# Altium PCB dell_sound_cap.PcbDoc
Units mm, origin at the board's own origin, x right, y up, seen from the top; angles counter-clockwise.
Board outline 13.5 x 55.5 mm, 2 copper layers (Top Layer, Bottom Layer); 16 components, 15 nets, 85 pads, 31 vias.
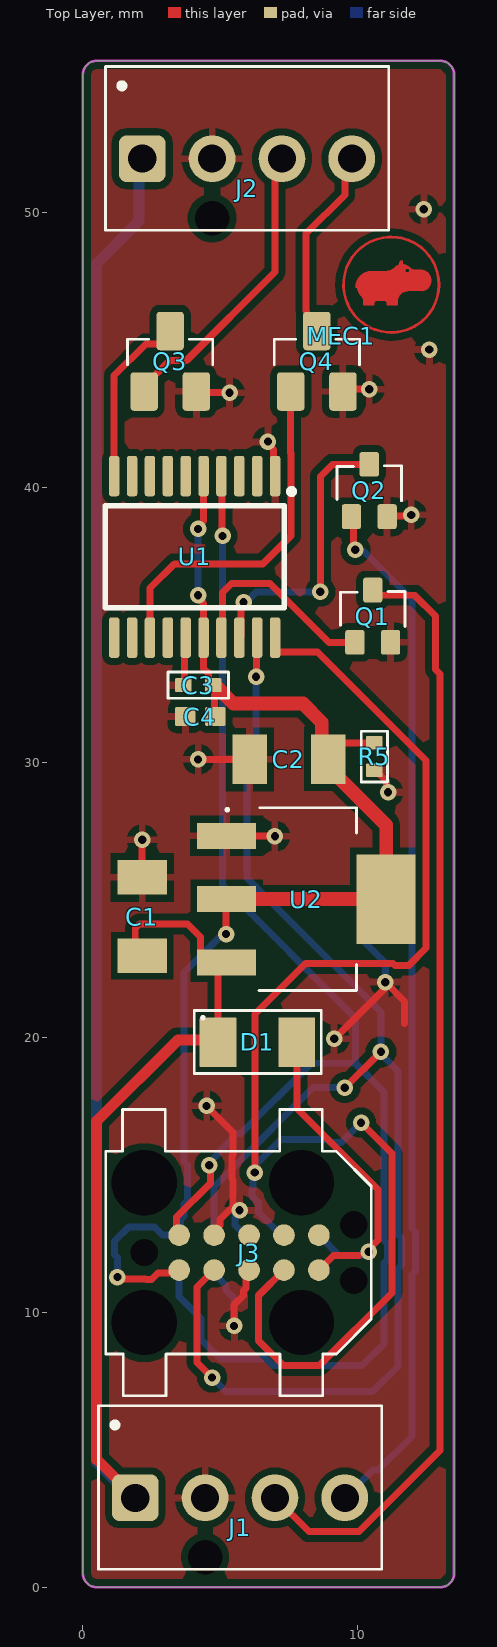
[diagram p0: Top Layer view]
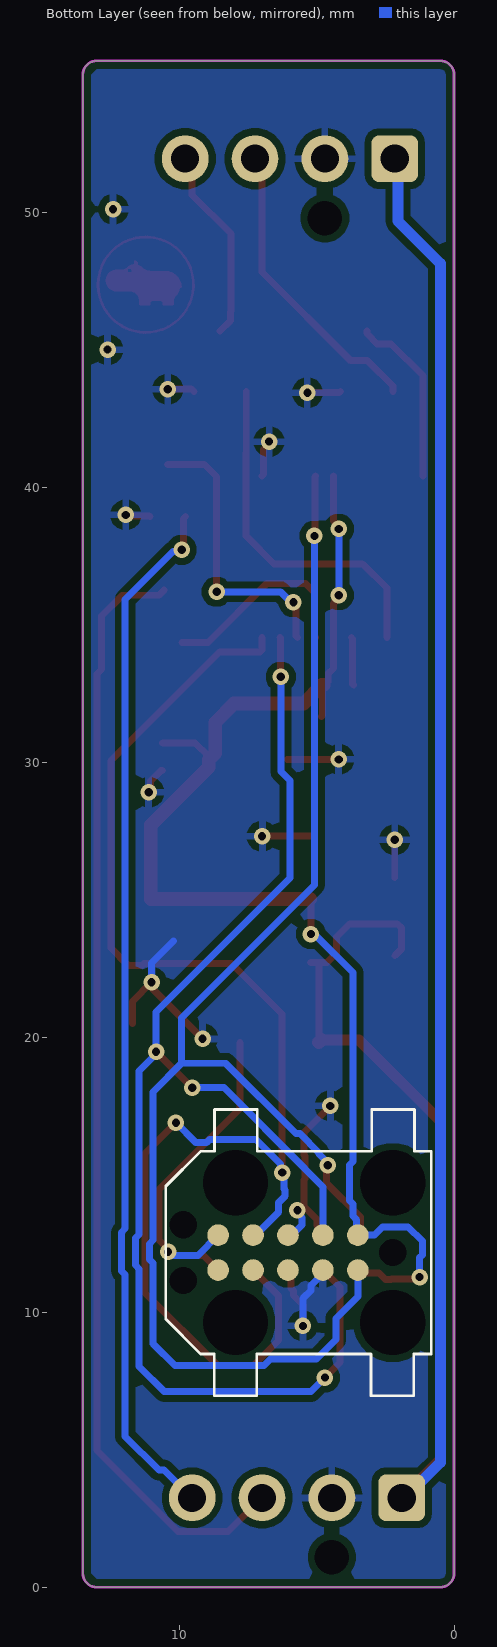
[diagram p1: Bottom Layer view, seen from below]
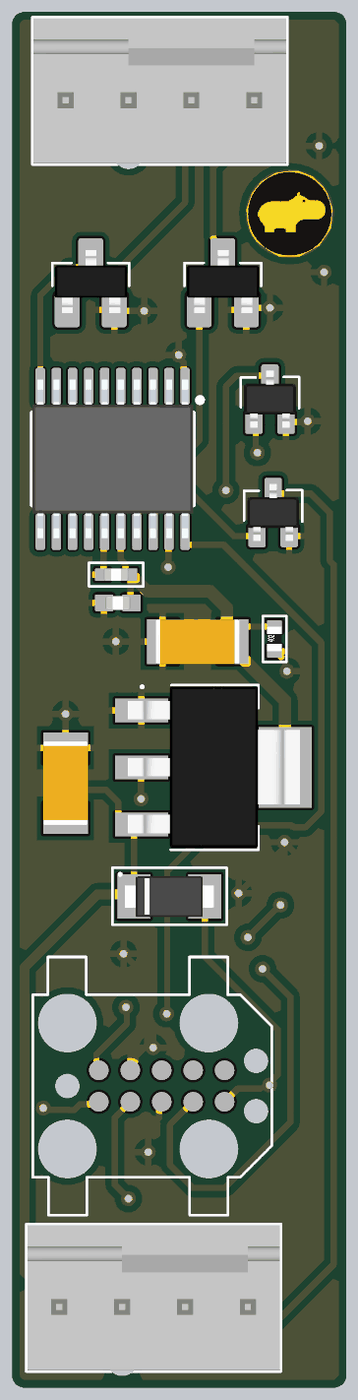
[diagram p2: 3D render of the assembled board from above, using the file's embedded part models]

## Layer stack, top to bottom
Top Solder: solder mask 0.0102, Solder Resist, Dk 3.5
Top Layer: signal copper 0.0356
Dielectric 1: dielectric 0.32, FR-4, Dk 4.8
Bottom Layer: signal copper 0.0356
Bottom Solder: solder mask 0.0102, Solder Resist, Dk 3.5

## Board outline
0,0.5 0,55 cw(c0.5,55) 0.5,55.5 13,55.5 cw(c13,55) 13.5,55 13.5,54.991 13.5,0.491 13.5,0.5 cw(c13,0.5) 13,0 0.5,0 cw(c0.5,0.5)

## Design rules (kind name [scope] priority, off if disabled: settings)
Clearance [All] p1: gap=0.254 ignorepadtopadclearanceinfootprint=FALSE
ComponentClearance [All] p1: gap=0.1 collisioncheckmode=3 verticalgap=0.254 showdistances=FALSE
MinimumSolderMaskSliver [All] p1: minsoldermaskwidth=0.1
PolygonConnect [All] p1: connectstyle=Relief reliefconductorwidth=0.254 reliefentries=4 polygonreliefangle="90 Angle" airgapwidth=0.254
RoutingVias [All] p1: holewidth=0.3 width=0.6 viastyle="Through Hole" minholewidth=0.3 minwidth=0.6 maxholewidth=0.3 maxwidth=0.6
SolderMaskExpansion [All] p1: expansion=0.102 istentingtop=FALSE
SupplyNets "Schematic Supply Nets_2" [InNet('+12V')] p1: voltage=0.000
SupplyNets "Schematic Supply Nets_1" [InNet('GND')] p2: voltage=0.000
SupplyNets "Schematic Supply Nets" [InNet('+3V3')] p3: voltage=0.000
Width [All] p1: maxlimit=5 minlimit=0.254 preferedwidth=0.254
28 further rules are at their usual default settings.

## Components (designator, comment, footprint, x,y, rotation, side; value= is the part's Value field where it differs from the comment)
C1 "10uF" CAP_1206_180_M 2.159,24.384 r180 top
C2 "10uF" CAP_1206_180_M 7.493,30.099 r270 top
C3 "10nF" CAP_0402_60_M 4.2,32.8 r270 top
C4 "4,7µF" CAP_0402_70_M 4.268,31.658 r270 top
D1 "SOD-123F" SOD-123FL 6.35,19.812 r0 top
J1 "CON_4PTS_2.54mm_KK_FAN" CON_4PTS_KK_FAN#1 5.715,3.248 r0 top
J2 "CON_4PTS_2.54mm_KK_FAN" CON_4PTS_KK_FAN#2 5.969,51.943 r0 top
J3 "JTAG" TC2050_DUAL 7.947,7.72 r0 top locked
MEC1 "LOGO_AESTECHNO" Logo_AESTECHNO 9.4,45.5 r0 top
Q1 "SOT-323" SOT-323 10.541,35.306 r0 top
Q2 "SOT-323" SOT-323 10.414,39.878 r0 top
Q3 "SOT23" SOT-23 3.175,44.577 r0 top
Q4 "SOT23" SOT-23 8.509,44.577 r0 top
R5 "1k" RES_0402_35_M 10.6,30.2 r90 top
U1 "STM32F030F4P6" TSSOP20-65P-650X440 4.064,37.465 r270 top
U2 "LM1117IMP-3.3/NOPB" SOT-223 8.128,25.019 r270 top

## Footprints (in the part's own frame and the unit in brackets; to place one, negate y for a bottom-side part, rotate by r counter-clockwise, add the part's x,y. Pads: shape width x height; smd on the part's side, far side on the other; paste and mask are expansions set on the pad)
CAP_0402_60_M [mm] "Capacitor chip 0402 60h M density"
  rrect15% 0.5x0.6 smd: 1(0,0.55) 2(0,-0.55)
  silkscreen extent -0.48,-1.1 0.48,1.1, body extent -0.26,-0.5 0.26,0.5, height 0.57
CAP_0402_70_M [mm] "Chip capacitor 0402 70 M"
  rrect15% 0.68x0.74 smd: 1(0,0.55) 2(0,-0.55)
  body extent -0.28,-0.5 0.29,0.5, height 0.51
CAP_1206_180_M [mm]
  rect 1.8x1.25 smd: 1(0,1.425) 2(0,-1.425)
  body extent -0.9,-1.7 0.9,1.7, height 1.8
CON_4PTS_KK_FAN#1 [mm] "47053-1000"
  rrect33% 1.7x1.7 hole 1.02: 1(-3.81,0)
  round 1.7 hole 1.02: 2(-1.27,0) 3(1.27,0) 4(3.81,0)
  round 0 hole 1.25 unplated: ""(-1.27,-2.16)
  silkscreen extent -5.15,-2.6 5.15,3.35, body extent -5.1,-2.54 5.1,3.3, height 10.04
CON_4PTS_KK_FAN#2 [mm] "47053-1000"
  rrect33% 1.7x1.7 hole 1.02: 1(-3.81,0)
  round 1.7 hole 1.02: 2(-1.27,0) 3(1.27,0) 4(3.81,0)
  round 0 hole 1.25 unplated: 3(-1.27,-2.16)
  silkscreen extent -5.15,-2.6 5.15,3.35, body extent -5.1,-2.54 5.1,3.3, height 10.04
Logo_AESTECHNO [mm]
  Top Layer pour cut-out: 0.922,0.297 1.235,0.168 1.519,0.092 1.706,0.074 1.92,0.07 2.214,0.099 2.696,0.287 2.839,0.378 2.915,0.418 3.088,0.574 3.421,1.012 3.597,1.575 3.597,2.065 3.494,2.562 3.219,3.006 2.87,3.318 2.409,3.563 2.064,3.639 1.695,3.656 1.366,3.608 1.116,3.517 0.787,3.333 0.677,3.256 0.472,3.06 0.214,2.7 0.105,2.395 0.016,2.032 0.036,1.575 0.126,1.263 0.189,1.097 0.249,0.994 0.433,0.705 0.69,0.462
  Top Layer region: 1067 vertices and 1 holes, not listed, extent 0.512,1.107 3.266,2.742
  Top Layer lines w0.1: 1.813,0.125 ccw(c1.813,1.86) 3.549,1.86 ccw(c1.813,1.86) 1.813,3.596 ; 2.614,3.4 ccw(c1.813,1.86) 0.273,2.661 ccw(c1.813,1.86) 1.012,0.321 ccw(c1.813,1.86) 3.353,1.059
RES_0402_35_M [mm] "Chip Resistor, 2-Leads, Body 1,00x0,50mm, IPC Medium Density"
  rrect15% 0.5x0.6 smd: 1(-0.5,0) 2(0.5,0)
  silkscreen extent -0.92,-0.48 0.92,0.48, body extent -0.5,-0.3 0.5,0.3, height 0.2
SOD-123FL [mm] "SODFL, 2-Leads, Body 1,73x3,60mm, IPC Medium Density"
  rrect5% 1.34x1.8 smd: 1(-1.43,0) 2(1.43,0)
  silkscreen extent -2.3,-1.14 2.32,1.16, body extent -1.79,-0.82 1.79,0.83, height 0.95
SOT-23 [mm]
  rrect25% 1x1.4 smd: 1(-0.95,-1.1) 2(0.95,-1.1) 3(0,1.1)
  silkscreen extent -1.55,-0.13 1.55,0.8, body extent -1.44,-1.23 1.48,1.32, height 0.99
SOT-223 [mm]
  rect 0.95x2.15 smd: 1(-2.3,-2.9) 2(0,-2.9) 3(2.3,-2.9)
  rect 3.25x2.15 smd: 4(0,2.9)
  silkscreen extent -3.32,-2.9 3.32,1.83, body extent -3.26,-3.46 3.24,3.5, height 1.66
SOT-323 [mm]
  rrect25% 0.7x0.9 smd: 1(-0.65,-0.95) 2(0.65,-0.95) 3(0,0.95)
  silkscreen extent -1.17,-0.38 1.17,0.9, body extent -1.05,-1.15 1.05,1.15, height 1
TC2050_DUAL [mil]
  round 31 smd: 1(-175,150) 2(-125,150) 3(-75,150) 4(-25,150) 5(25,150) 6(25,200) 7(-25,200) 8(-75,200) 9(-125,200) 10(-175,200)
  round 31 smd far side: 1(-175,200) 2(-125,200) 3(-75,200) 4(-25,200) 5(25,200) 6(25,150) 7(-25,150) 8(-75,150) 9(-125,150) 10(-175,150)
  round 0 hole 93.5 unplated: ""(-225,75) ""(-225,275) ""(0,75) ""(0,275)
  round 0 hole 39 unplated: ""(-225,175) ""(75,135.04) ""(75,214.96)
  silkscreen extent -280,-30 100,380
TSSOP20-65P-650X440 [mm]
  rrect50% 1.475x0.38 smd mask+0.07: 1(-2.938,2.925) 2(-2.938,2.275) 3(-2.938,1.625) 4(-2.938,0.975) 5(-2.938,0.325) 6(-2.938,-0.325) 7(-2.938,-0.975) 8(-2.938,-1.625) 9(-2.938,-2.275) 10(-2.938,-2.925) 11(2.938,-2.925) 12(2.938,-2.275) 13(2.938,-1.625) 14(2.938,-0.975) 15(2.938,-0.325) 16(2.938,0.325) 17(2.938,0.975) 18(2.938,1.625) 19(2.938,2.275) 20(2.938,2.925)
  silkscreen extent -2.47,-3.25 1.85,3.62, body extent -3.2,-3.25 3.2,3.25, height 1.2

## Part data
C1 C2: library part CAP_10uF_1206_50V_X5R, "CAP CER 10uF 50V 1206 X5R", Case Code (Imperial)=1206, Case Code (Metric)=3216, Dielectric=X5R, Manufacturer=Samsung, Manufacturer Part Number=CL31A106KBHNNNE, Max Operating Temperature=85°C, Min Operating Temperature=-55°C, Package Quantity=1, Supplier Part Number 1=1276-2876-1-ND, Tolerance=10%, Voltage Rating=50V, Capacitance=10uF, Case/Package=1206, ComponentLink1Description=Datasheet, ComponentLink1URL=https://media.digikey.com/pdf/Data%20Sheets/Samsung%20PDFs/CL_Series_MLCC_ds.pdf, ComponentLink2Description=http://www1.futureelectronics.com/doc/SAMSUNG%20PASSIVE/CL05B104KQ5NNNC.pdf, ComponentLink2URL=http://www1.futureelectronics.com/doc/SAMSUNG%20PASSIVE/CL05B104KQ5NNNC.pdf, ComponentLink3Description=http://www.rapidonline.com/pdf/71-0881.pdf, ComponentLink3URL=http://www.rapidonline.com/pdf/71-0881.pdf, ComponentLink4Description=https://www.verical.com/server-webapp/html/getDatasheet?partID=353196, ComponentLink4URL=https://www.verical.com/server-webapp/html/getDatasheet?partID=353196, ComponentLink5Description=https://produktinfo.conrad.com/datenblaetter/450000-474999/452492-da-01-en-VS_KONDENSATOR_1206.pdf, ComponentLink5URL=https://produktinfo.conrad.com/datenblaetter/450000-474999/452492-da-01-en-VS_KONDENSATOR_1206.pdf, Contact Plating=Tin, Depth=1.6mm, Height=1.6mm, Lead Free="Lead Free", Length=3.2mm, Material=Ceramic, Mount="Surface Mount", Packaging="Tape and Reel", Pricing 1="1 = 0,67000, 10 = 0,47700, 100 = 0,31420, 500 = 0,23276, 1000 = 0,19784 (USD)", Radiation Hardening=No, RoHS=Yes, Stock 1=1003545, Supplier 1=Digi-Key, Thickness=0.071inch, Voltage Rating (DC)=50V, Width=0.063inch
C3: library part CAP_10nF_0402_50V_X7R, "CAP CER 10nF 50V 0402 X7R", Case Code (Imperial)=0402, Case Code (Metric)=1005, Dielectric=X7R, Manufacturer=Samsung, Manufacturer Part Number=CL05B103KB5NNNC, Max Operating Temperature=125°C, Min Operating Temperature=-55°C, Package Quantity=1, Supplier Part Number 1=1276-1028-1-ND, Tolerance=10%, Voltage=50V, Capacitance=10nF, Case/Package=0402, ComponentLink1Description=Datasheet, ComponentLink1URL=https://www.verical.com/server-webapp/html/getDatasheet?partID=359682&src-supplier=Verical, ComponentLink2Description=https://www.distrelec.biz/Web/Downloads/_e/ng/MLCC_CatalogDownload2013_ENG.pdf?mime=application%2Fpdf&src-supplier=Distrelec, ComponentLink2URL=https://www.distrelec.biz/Web/Downloads/_e/ng/MLCC_CatalogDownload2013_ENG.pdf?mime=application%2Fpdf&src-supplier=Distrelec, ComponentLink3Description=https://produktinfo.conrad.com/datenblaetter/450000-474999/458761-da-01-en-VS_KONDENSATOR_0402.pdf?src-supplier=Conrad, ComponentLink3URL=https://produktinfo.conrad.com/datenblaetter/450000-474999/458761-da-01-en-VS_KONDENSATOR_0402.pdf?src-supplier=Conrad, Contact Plating=Tin, Depth=0.5mm, Height=0.5mm, Lead Free="Lead Free", Length=1mm, Material=Ceramic, Mount="Surface Mount", Packaging="Tape and Reel", Pricing 1="1 = 0,10000, 10 = 0,02300, 100 = 0,01020, 500 = 0,00726, 1000 = 0,00571, 2500 = 0,00519, 5000 = 0,00477 (USD)", Radiation Hardening=No, RoHS=Yes, Stock 1=10927176, Supplier 1=Digi-Key, Thickness=0.022inch, Voltage Rating=50V, Voltage Rating (DC)=50V, Width=0.02inch
C4: library part CAP_4.7uF_0402_10V_X5R, "CAP CER 4.7uF 10V X5R 0402", Case/Package=0402, Dielectric=X5R, Manufacturer=Murata, Manufacturer Part Number=GRM155R61A475MEAAD, Supplier Part Number 1=490-14306-1-ND, Tolerance=20%, Voltage=10V, Capacitance=4,7µF, ComponentLink1Description=https://datasheet.ciiva.com/144/docfinderpartnumber-c0402c470j5gactu-144106.pdf?src-supplier=Digi-Key, ComponentLink1URL=https://datasheet.ciiva.com/144/docfinderpartnumber-c0402c470j5gactu-144106.pdf?src-supplier=Digi-Key, ComponentLink2Description=https://datasheet.ciiva.com/18100/getdatasheetpartid-32341-18100871.pdf?src-supplier=Verical, ComponentLink2URL=https://datasheet.ciiva.com/18100/getdatasheetpartid-32341-18100871.pdf?src-supplier=Verical, ComponentLink3Description=https://datasheet.ciiva.com/7378/1372242-7378762.pdf?src-supplier=Newark, ComponentLink3URL=https://datasheet.ciiva.com/7378/1372242-7378762.pdf?src-supplier=Newark, ComponentLink4Description=https://datasheet.ciiva.com/7747/f9080b-0402-series-c0g-7747645.pdf?src-supplier=Element14, ComponentLink4URL=https://datasheet.ciiva.com/7747/f9080b-0402-series-c0g-7747645.pdf?src-supplier=Element14, ComponentLink5Description=https://datasheet.ciiva.com/14588/70095383-14588206.pdf?src-supplier=Allied+Electronics, ComponentLink5URL=https://datasheet.ciiva.com/14588/70095383-14588206.pdf?src-supplier=Allied+Electronics, ComponentLink6Description=https://datasheet.ciiva.com/7747/40889-7747541.pdf?src-supplier=Element14, ComponentLink6URL=https://datasheet.ciiva.com/7747/40889-7747541.pdf?src-supplier=Element14, ComponentLink7Description=https://datasheet.ciiva.com/6177/f9080b-0402-series-c0g-6177898.pdf?src-supplier=Farnell, ComponentLink7URL=https://datasheet.ciiva.com/6177/f9080b-0402-series-c0g-6177898.pdf?src-supplier=Farnell, ComponentLink8Description=https://datasheet.ciiva.com/7378/1372242-7378507.pdf?src-supplier=Newark, ComponentLink8URL=https://datasheet.ciiva.com/7378/1372242-7378507.pdf?src-supplier=Newark, ComponentLink9Description=https://datasheet.ciiva.com/14602/70095383-14602972.pdf?src-supplier=Allied+Electronics, ComponentLink9URL=https://datasheet.ciiva.com/14602/70095383-14602972.pdf?src-supplier=Allied+Electronics, ComponentLink10Description=https://datasheet.ciiva.com/5422/kem-c1003-c0g-smd-5422301.pdf?src-supplier=Mouser, ComponentLink10URL=https://datasheet.ciiva.com/5422/kem-c1003-c0g-smd-5422301.pdf?src-supplier=Mouser, ComponentLink11Description=http://www.farnell.com/datasheets/2189109.pdf?src-supplier=Farnell, ComponentLink11URL=http://www.farnell.com/datasheets/2189109.pdf?src-supplier=Farnell, ComponentLink12Description=http://search.murata.co.jp/Ceramy/image/img/A01X/G101/ENG/GRM155R61A475MEAA-01.pdf?src-supplier=Digi-Key, ComponentLink12URL=http://search.murata.co.jp/Ceramy/image/img/A01X/G101/ENG/GRM155R61A475MEAA-01.pdf?src-supplier=Digi-Key, ComponentLink13Description=https://search.murata.co.jp/Ceramy/image/img/A01X/G101/ENG/GRM155R61A475MEAA-01.pdf?src-supplier=Digi-Key, ComponentLink13URL=https://search.murata.co.jp/Ceramy/image/img/A01X/G101/ENG/GRM155R61A475MEAA-01.pdf?src-supplier=Digi-Key, ComponentLink14Description=http://datasheet.octopart.com/GRM155R61A475MEAAD-Murata-datasheet-68589269.pdf?src-supplier=Newark, ComponentLink14URL=http://datasheet.octopart.com/GRM155R61A475MEAAD-Murata-datasheet-68589269.pdf?src-supplier=Newark, ComponentLink15Description=http://datasheet.octopart.com/GRM155R61A475MEAAD-Murata-datasheet-8819587.pdf, ComponentLink15URL=http://datasheet.octopart.com/GRM155R61A475MEAAD-Murata-datasheet-8819587.pdf, ComponentLink16Description=http://datasheet.octopart.com/GRM155R61A475MEAAD-Murata-datasheet-10025737.pdf, ComponentLink16URL=http://datasheet.octopart.com/GRM155R61A475MEAAD-Murata-datasheet-10025737.pdf, ComponentLink17Description=http://datasheet.octopart.com/GRM155R61A475MEAAD-Murata-datasheet-11978611.pdf, ComponentLink17URL=http://datasheet.octopart.com/GRM155R61A475MEAAD-Murata-datasheet-11978611.pdf, ComponentLink18Description=http://datasheet.octopart.com/GRM155R61A475MEAAD-Murata-datasheet-12510076.pdf, ComponentLink18URL=http://datasheet.octopart.com/GRM155R61A475MEAAD-Murata-datasheet-12510076.pdf, ComponentLink19Description=http://datasheet.octopart.com/GRM155R61A475MEAAD-Murata-datasheet-12515295.pdf, ComponentLink19URL=http://datasheet.octopart.com/GRM155R61A475MEAAD-Murata-datasheet-12515295.pdf, Pricing 1="1 = 0,23000, 10 = 0,15400, 100 = 0,07780, 500 = 0,05322, 1000 = 0,04708, 2500 = 0,04504, 5000 = 0,04094 (USD)", Stock 1=680935, Supplier 1=Digi-Key
D1: library part DIO_SCHOTTKY_1A_20V_SOD_123F, "DIODE SCHOTTKY 20V 1A SOD-123F", Average Rectified Current=1A, Manufacturer="ON Semiconductor / Fairchild", Manufacturer Part Number=MBR1020VL, Max Forward Surge Current (Ifsm)=45A, Max Repetitive Reverse Voltage (Vrrm)=20V, Supplier Part Number 1=MBR1020VLCT-ND, Case/Package=SOD-123F, ComponentLink1Description=Datasheet, ComponentLink1URL=https://datasheet.octopart.com/MBR1020VL-ON-Semiconductor-datasheet-86697812.pdf, ComponentLink2Description=http://www.farnell.com/datasheets/2552643.pdf?src-supplier=Farnell, ComponentLink2URL=http://www.farnell.com/datasheets/2552643.pdf?src-supplier=Farnell, ComponentLink3Description=https://www.fairchildsemi.com/datasheets/MB/MBR1020VL.pdf?src-supplier=Digi-Key, ComponentLink3URL=https://www.fairchildsemi.com/datasheets/MB/MBR1020VL.pdf?src-supplier=Digi-Key, ComponentLink4Description=http://www.farnell.com/datasheets/2552643.pdf?src-supplier=Newark, ComponentLink4URL=http://www.farnell.com/datasheets/2552643.pdf?src-supplier=Newark, Element Configuration=Single, Max Reverse Voltage (DC)=20V, Mount="Surface Mount", Packaging="Tape and Reel", Pricing 1="1 = 0,380000, 10 = 0,279000, 100 = 0,158200, 500 = 0,104760, 1000 = 0,080320 (USD)", Reverse Recovery Time=12.4ns, RoHS=Yes, Stock 1=25209, Supplier 1=Digi-Key, Supplier 2=Digi-Key, Supplier Part Number 2=1514-CMMSH1-20GTRPBFREECT-ND, Weight=0.0276g
J1 J2: "CONN HEADER VERT 4POS 2.54MM", Color=Beige, Manufacturer=Molex, Manufacturer Part Number=0470531000, Max Operating Temperature=75°C, Min Operating Temperature=0°C, Supplier Part Number 1=WM4330-ND, ComponentLink1Description=Drawings, ComponentLink1URL=https://www.molex.com/pdm_docs/sd/470531000_sd.pdf, Connector Type="Male Pin", Contact Material="Brass,Copper Alloy", Contact Mating Length=0.295inch, Contact Plating=Tin, Depth=5.84mm, Fastening Type=Friction, Housing Color=Beige, Housing Material=Nylon, Length=10.2mm, Mount="Through Hole", Number of Contacts=4, Number of Positions=4, Number of Rows=1, Orientation=Straight, Packaging=Bulk, Pitch=2.54mm, RoHS=Yes, Stock 1=41699, Supplier 1=Digi-Key, Termination=Solder
J3: library part TC2050_DUAL, "JTAG CONNECTOR", ComponentLink1Description=Datasheet
MEC1: "LOGO AESTECNO"
Q1 Q2: library part TRS_NMOS_30V_0.38A_DMN63D8LW-13, "MOSFET N-CH 30V 0.38A SOT323", Continuous Drain Current (ID)=380mA, Drain to Source Voltage (Vdss)=30V, Input Capacitance=23.2pF, Manufacturer=Diodes, Manufacturer Part Number=DMN63D8LW-13, Max Operating Temperature=150°C, Max Power Dissipation=300mW, Min Operating Temperature=-55°C, Supplier Part Number 1=DMN63D8LW-13DICT-ND, Case/Package=SOT-323, ComponentLink1Description=Datasheet, ComponentLink1URL=https://www.diodes.com/assets/Datasheets/DMN63D8LW.pdf, Mount="Surface Mount", Packaging="Tape and Reel", Pricing 1="1=0,26000, 10=0,24100, 100=0,13480, 500=0,07222, 1000=0,04912 (USD)", Rds On Max=2.8R, RoHS=Yes, Stock 1=214518, Supplier 1=Digi-Key
Q3 Q4: library part TRS_NMOS_30V_5.8AA_DMN3404L-7_SOT23, "Small Signal Field-Effect Transistor", Drain Current-Max (Abs) (ID)=5.8A, Drain-source On Resistance-Max=28mR, DS Breakdown Voltage-Min=30V, Manufacturer=Diodes, Manufacturer Part Number=DMN3404L-7, Max Operating Temperature=150°C, Operating Mode="ENHANCEMENT MODE", Package Body Material=Plastic, Package Shape=Rectangular, Package Style="SMALL OUTLINEMeter", Peak Reflow Temperature (Cel)=260°C, Power Dissipation-Max (Abs)=1.4W, Pulsed Drain Current-Max (IDM)=30A, Supplier Part Number=DMN3404LDICT-ND, Time @ Peak Reflow Temperature-Max (s)=40s, Additional Feature="HIGH RELIABILITY", Case/Package=SOT23, Category=MOSFETs, ComponentLink1Description=Datasheet, ComponentLink1URL=https://www.diodes.com/assets/Datasheets/DMN63D8LW.pdf, Drain Current-Max (ID)=5.8A, FET Technology="METAL-OXIDE SEMICONDUCTOR", JESD-30 Code=R-PDSO-G3, JESD-609 Code=e3, Moisture Sensitivity Level=1, Number of Elements=1, Pins=3, Polarity/Channel Type=N-CHANNEL, Pricing="1=0.35, 10=0.211, 100=0.1326, 500=0.09838, 1000=0.08729 (USD)", Qualification Status="Not Qualified", Reach SVHC Compliant=Yes, RoHS=Yes, RoHS Compliant=Yes, Stock=79423, Supplier=Digikey, Surface Mount=Yes, Terminal Finish=Tin, Terminal Form="Gull Wing", Terminal Position=DUAL, Transistor Application=SWITCHING, Transistor Element Material=SILICON
R5: library part RES_1K_62.5mW_1%_0402, "RES 1k 62.5mW 1% 0402", Case Code (Imperial)=0402, Case Code (Metric)=1005, Manufacturer=Yageo, Manufacturer Part Number=RC0402FR-071KL, Max Operating Temperature=155°C, Min Operating Temperature=-55°C, Power Rating=63mW, Supplier Part Number 1=311-1.00KLRCT-ND, Temperature Coefficient=100ppm/°C, Tolerance=1%, Voltage Rating=50V, Case/Package=0402, ComponentLink1Description=http://documents.rs-components.com/techlib://itc_doclist_GB.htm?stockno=6186122&src-supplier=RSComponents, ComponentLink1URL=http://documents.rs-components.com/techlib://itc_doclist_GB.htm?stockno=6186122&src-supplier=RSComponents, ComponentLink2Description=http://www.mouser.com/ds/2/447/PYu-RC0402_51_RoHS_L_6_r-8721.pdf?src-supplier=Mouser, ComponentLink2URL=http://www.mouser.com/ds/2/447/PYu-RC0402_51_RoHS_L_6_r-8721.pdf?src-supplier=Mouser, ComponentLink3Description=http://www.yageo.com/documents/recent/PYu-RC0402_51_RoHS_L_6_r.pdf?src-supplier=Future+Electronics, ComponentLink3URL=http://www.yageo.com/documents/recent/PYu-RC0402_51_RoHS_L_6_r.pdf?src-supplier=Future+Electronics, ComponentLink4Description=http://www.farnell.com/datasheets/1018594.pdf?src-supplier=Element14, ComponentLink4URL=http://www.farnell.com/datasheets/1018594.pdf?src-supplier=Element14, ComponentLink5Description=http://www.farnell.com/datasheets/2167052.pdf?src-supplier=Element14, ComponentLink5URL=http://www.farnell.com/datasheets/2167052.pdf?src-supplier=Element14, Composition="Thick Film", Depth=0.5mm, Height=0.32mm, Lead Free="Lead Free", Length=1mm, Military Standard=Not, Number of Pins=2, Packaging="Tape and Reel", Pricing 1="1 = 0,10000, 10 = 0,01600, 100 = 0,00670, 1000 = 0,00301, 2500 = 0,00261, 5000 = 0,00215 (USD)", REACH SVHC=Unknown, Resistance=1k, RoHS=Yes, Stock 1=111913296, Supplier 1=Digi-Key, Termination=SMD/SMT, Voltage Rating (DC)=50V, Width=0.5mm
U1: "ARM® Cortex®-M0 STM32F0 Microcontroller IC 32-Bit Single-Core 48MHz 16KB (16K x 8) FLASH 20-TSSOP", Manufacturer_Name=ST, Manufacturer_Part_Number=STM32F030F4P6TR, PartNumber=1000044559, Rev=A
U2: library part CIN_REG_LDO_3V3_800mA_SOT-223, "REG LDO 3V3 800mA", Case/Package=SOT-223, Dropout Voltage=1.2V, Manufacturer="Texas Instruments", Manufacturer Part Number=LM1117IMPX-3.3/NOPB, Max Input Voltage=15V, Max Operating Temperature=125°C, Max Output Current=800mA, Min Input Voltage=2.6V, Min Operating Temperature=-40°C, Nominal Output Voltage=3.3V, Output Voltage Accuracy=1%, Quiescent Current=5mA, Supplier Part Number 1=LM1117IMPX-3.3/NOPBCT-ND, Accuracy=1%, ComponentLink1Description=Datasheet, ComponentLink1URL=http://www.ti.com/lit/ds/symlink/lm1117.pdf, ComponentLink2Description=http://www.farnell.com/datasheets/1882372.pdf?src-supplier=Element14, ComponentLink2URL=http://www.farnell.com/datasheets/1882372.pdf?src-supplier=Element14, Contact Plating=Matte,Tin, Lead Free="Lead Free", Mount="Surface Mount", Number of Outputs=1, Number of Pins=4, Output Current=800mA, Output Type=Fixed, Output Voltage=3.3V, Packaging="Tape and Reel", Polarity=Positive, Pricing 1="1 = 1,14000, 10 = 1,01500, 100 = 0,79120, 500 = 0,65364, 1000 = 0,51603 (USD)", REACH SVHC="No SVHC", RoHS=Yes, Stock 1=34433, Supplier 1=Digi-Key

## Via types
v1: diameter 0.6, hole 0.3, Top Layer to Bottom Layer, tented both sides, 31 vias

## Nets (pads, with @x,y where several pads share a name; then routed paths per layer and width w, separated by ;. In a path a pad name is that pad's centre, name@x,y a point inside that pad or via, vN(x,y) a via of type N, cw(c..) or ccw(c..) an arc to the next point about the centre after c; other vN are vias at no path point)
+3V3: C2.1 C3.1 C4.1 J3.1 R5.2 U1.5 U1.16 U2.2 U2.4 | length 48.4
  Top Layer w0.254: v1(1.258,11.275) 1.324,11.209 2.274,11.209 2.289,11.193 2.5,11.193 2.734,11.428 3.4,11.428 J3.1@3.502,11.53 ; v1(4.191,36.068) 4.191,35.974 4.389,35.776 4.389,33.408 4.577,33.22 4.577,32.923 4.7,32.8 C3.1 ; v1(4.191,38.481) 4.191,38.575 4.389,38.773 U1.5 ; C3.1@4.8,32.8 4.784,32.784 4.784,31.693 C4.1 ; v1(5.207,23.749) 5.207,24.998 U2.2 ; C2.1 8.918,30.202 9.416,30.7 R5.2
  Top Layer w0.5: C3.1 4.8,32.8 5.469,32.131 8.001,32.131 8.683,31.449 8.683,30.334 C2.1 8.918,29.824 11.028,27.714 U2.4 U2.2
  Bottom Layer w0.254: v1(1.258,11.275) 1.258,11.981 1.156,12.083 1.156,12.586 1.67,13.1 2.6,13.1 2.898,12.802 3.5,12.802 J3.1@3.502,12.8 ; J3.1@3.404,12.802 3.542,12.94 3.542,13.348 3.683,13.489 3.683,13.938 3.8,14.055 3.8,15.355 3.683,15.472 3.683,22.352 5.014,23.683 5.141,23.683 v1(5.207,23.749) ; v1(4.191,36.068) v1(4.191,38.481)
+12V: C1.1 D1.1 J1.1 J2.1 U2.3 | length 78.3
  Top Layer w0.254: C1.1 1.905,23.213 1.905,23.965 2.054,24.114 3.809,24.114 4.28,23.643 4.28,23.067 4.628,22.719 U2.3@4.92,22.719 ; D1.1 U2.3@4.92,22.719 ; U2.3 U2.3@4.92,22.719
  Top Layer w0.4: J1.1 0.504,4.649 0.504,16.955 3.452,19.903 D1.1@4.829,19.903
  Top Layer w0.5: D1.1@4.829,19.903 D1.1
  Bottom Layer w0.4: J1.1 1.324,3.829 1.214,3.829 0.504,4.539 0.504,48.129 2.049,49.674 2.049,51.833 J2.1
GND: C1.2 C2.2 C3.2 C4.2 J1.2 J2.2 J3.3 J3.9 Q1.2 Q2.2 Q3.2 Q4.2 R5.1 U1.1 U1.15 U2.1 | length 30.3
  Top Layer w0.254: C1.2 v1(2.159,27.178) ; C3.2 3.695,32.844 3.695,34.483 U1.15 ; Q3.2 4.168,43.434 v1(5.334,43.434) ; v1(4.191,30.099) C2.2 ; v1(4.5,17.5) 5.461,16.539 5.461,15.716 5.419,15.674 5.419,14.85 5.461,14.808 v1@5.461,13.843 ; J3.9@4.772,12.8 4.772,12.944 4.979,13.152 4.979,13.361 v1@5.461,13.843 ; U2.1 5.242,27.305 v1(6.985,27.305) ; v1(5.498,9.5) 5.498,10.267 5.842,10.612 5.842,10.778 5.94,10.876 5.94,11.428 J3.3@6.042,11.53 ; v1(5.697,13.708) 5.604,13.708 5.469,13.843 v1@5.461,13.843 ; v1(6.731,41.656) 6.731,41.562 6.926,41.367 6.926,40.466 U1.1 ; v1(9.146,19.942) 11,21.796 v1(11,22) 11.7,21.3 11.7,20.5 ; Q4.2 9.543,43.561 v1(10.414,43.561) ; R5.1 10.65,29.7 11.034,29.316 11.034,28.966 v1(11.1,28.9) ; Q2.2 11.094,38.958 11.907,38.958 v1(11.938,38.989)
  Bottom Layer w0.254: J3.9@4.772,11.53 4.772,11.41 5.21,10.972 5.21,10.792 5.498,10.504 v1(5.498,9.5) ; v1(5.697,13.708) 5.697,13.614 5.524,13.441 5.524,13.162 5.536,13.162 5.898,12.8 J3.3@6.042,12.8 ; 10.2,23.5 11,22.7 v1(11,22)
  other v1: 12.6,45 12.4,50.1
NetD1_2: D1.2 J3.5 | length 12.8
  Top Layer w0.254: D1.2 7.78,17.402 10.728,14.454 10.728,12.622 10.4,12.294 v1(10.4,12.2) ; J3.5@8.582,11.53 8.585,11.53 9.12,12.065 10.033,12.065
  Bottom Layer w0.254: J3.5@8.582,12.8 9.317,12.065 v1@10.4,12.065
NetJ2_3: J2.3@7.239,51.943 Q3.1 | length 10.9
  Top Layer w0.254: Q3.1 2.225,43.677 3.144,44.596 3.76,44.596 6.985,47.821 6.985,51.689 J2.3@7.239,51.943
NetJ2_4: J2.4 Q4.3 | length 7.1
  Top Layer w0.254: Q4.3 8.136,46.05 8.136,46.383 8.121,46.399 8.121,49.221 9.525,50.625 9.525,51.689 J2.4
NRST#: J3.10 U1.4 | length 54.4
  Top Layer w0.254: J3.10@3.502,12.8 3.404,12.898 3.404,13.454 4.633,14.683 4.633,15.306 v1(4.598,15.341) ; U1.4 5.059,40.382 5.059,38.248 v1(5.08,38.227)
  Bottom Layer w0.254: J3.10@3.502,11.53 3.502,10.573 4.302,9.773 4.302,8.998 5,8.3 6.677,8.3 6.92,8.057 10.151,8.057 10.945,8.85 10.945,11.782 11.081,11.918 11.081,12.482 10.945,12.618 10.945,18.011 9.906,19.05 ; v1(4.598,15.341) 4.598,15.434 4.911,15.747 4.911,15.792 5.607,16.489 5.747,16.489 8.308,19.05 9.906,19.05 ; v1(5.08,38.227) 5.08,25.527 9.906,20.701 9.906,19.05
PWM_IN: Q2.3 U1.18 | length 10.5
  Top Layer w0.254: U1.18 5.752,34.59 5.752,35.63 5.842,35.72 v1(5.842,35.814) ; v1(8.636,36.195) 8.636,40.386 9.078,40.828 Q2.3
  Bottom Layer w0.254: v1(5.842,35.814) 5.936,35.814 6.317,36.195 v1(8.636,36.195)
PWM_IN_R: J1.4 Q2.1 | length 38
  Top Layer w0.254: Q2.1 9.84,38.852 9.84,37.785 v1(9.906,37.719)
  Bottom Layer w0.254: J1.4 9.545,3.248 10.556,4.258 10.735,4.258 11.961,5.484 11.961,11.361 12.097,11.497 12.097,12.903 11.961,13.039 11.961,35.918 10.226,37.653 9.972,37.653 v1(9.906,37.719)
PWM_OUT: Q4.1 U1.13 | length 13
  Top Layer w0.254: U1.13 2.439,36.326 3.324,37.211 6.542,37.211 7.56,38.229 7.56,41.243 7.559,41.244 Q4.1
SENSE_IN: Q1.1 U1.17 | length 7.5
  Top Layer w0.254: U1.17 5.08,34.568 5.08,36.173 5.402,36.495 6.812,36.495 8.951,34.356 Q1.1
SENSE_IN_Q: J1.3 Q1.3 | length 40.8
  Top Layer w0.254: J1.3 8.216,2.017 10.035,2.017 12.992,4.974 12.992,33.198 12.827,33.363 12.827,35.306 12.065,36.068 10.729,36.068 Q1.3
SENSE_OUT: Q3.3 U1.10 | length 6.4
  Top Layer w0.254: U1.10 1.139,44.057 2.294,45.212 2.802,45.212 3.175,45.585 Q3.3
SWDCLK: J3.4 U1.20 | length 51.1
  Top Layer w0.254: v1@6.262,15.094 6.262,20.845 8.098,22.681 11.282,22.681 11.35,22.613 11.861,22.613 12.484,23.236 12.484,30.061 8.534,34.011 7.052,34.011 6.989,34.074 U1.20 ; J3.4@7.312,11.53 6.379,10.597 6.379,8.975 7.297,8.057 8.597,8.057 11.236,10.696 11.236,15.769 v1(10.114,16.891)
  Bottom Layer w0.254: v1@6.142,15.077 6.152,15.077 6.312,15.237 6.312,15.388 7.197,16.273 8.897,16.273 8.997,16.173 9.396,16.173 v1(10.114,16.891) ; v1(6.246,15.077) 6.18,15.011 6.18,14.474 6.142,14.437 6.142,14.226 6.378,13.99 6.378,13.634 7.212,12.8 J3.4@7.312,12.8
SWDIO: J3.2 U1.19 | length 50.6
  Top Layer w0.254: v1(4.699,7.62) 4.154,8.165 4.154,10.912 J3.2@4.772,11.53 ; v1(6.3,33.1) 6.319,33.119 6.319,34.508 U1.19 ; v1(9.525,18.161) 9.529,18.161 10.835,19.468 v1(10.839,19.468)
  Bottom Layer w0.254: v1(4.699,7.62) 5.207,7.112 10.541,7.112 11.453,8.024 11.453,11.572 11.589,11.708 11.589,12.692 11.453,12.828 11.453,18.773 10.839,19.387 10.839,20.911 5.969,25.781 5.969,29.328 6.3,29.659 v1(6.3,33.1) ; J3.2@4.772,12.8 4.772,14.551 5.419,15.198 5.419,15.214 8.366,18.161 v1(9.525,18.161)
pads on no net: J1. J2.3@4.699,49.783 J3. J3.6 J3.7 J3.8 U1.2 U1.3 U1.6 U1.7 U1.8 U1.9 U1.11 U1.12 U1.14

## Polygon pours and split planes (outlines as drawn)
GND on Bottom Layer "GND_L02_P001" (solid, remove dead copper, pour order 1): 0,0.5 0,55 cw(c0.5,55) 0.5,55.5 13,55.5 cw(c13,55) 13.5,55 13.5,54.991 13.5,0.491 13.5,0.5 cw(c13,0.5) 13,0 0.5,0 cw(c0.5,0.5)
GND on Top Layer "GND_L01_P000" (solid, remove dead copper, pour order 0): 0,0.5 0,55 cw(c0.5,55) 0.5,55.5 13,55.5 cw(c13,55) 13.5,55 13.5,54.991 13.5,0.491 13.5,0.5 cw(c13,0.5) 13,0 0.5,0 cw(c0.5,0.5)

## Keep-outs
Keep-Out Layer:
  lines w0.1: 13.5,0.491 13.5,54.991 ; 13.5,0.5 cw(c13,0.5) 13,0 0.5,0 cw(c0.5,0.5) 0,0.5 0,55 cw(c0.5,55) 0.5,55.5 13,55.5 cw(c13,55) 13.5,55